# EAGLE board proyecto (EAGLE 9.0.1)

Size 56.82 x 53.33 mm. Coordinates in mm from the lower left corner, seen from the top.
Outline: 0,0 56.82,0 56.82,53.33 0,53.33 0,0
Copper layers (1*16): Top 0.035mm / dielectric 1.5mm / Bottom 0.035mm
Design rules "default": minimum track width 10mil, minimum drill 24mil, track to track 8mil, track to pad 8mil, pad to pad 8mil, via to via 8mil, smd to smd 8mil, copper to edge 40mil, drill to drill 8mil, minimum pad ring 10mil, minimum via ring 8mil, stop-mask expansion 4mil, vias tented up to drill 0mil, thermal gap 10mil

## Footprints (pad centres in the part's own frame; a part is rotated, then mirrored left to right if it is on the bottom)
DC-POWER = drill 0.889 pad 2.54 octagon: + 0,2.54; - 0,-2.54
RADIAL-D11.36MM = drill 1.27 pad 1.905 square: + -2.54,0 | drill 1.27 pad 1.905: - 2.54,0
D-7.5 = drill 0.813 long: A 3.81,0; C -3.81,0
M3XXH = drill 1.016 long: 1 -3.81,3.81; 2 -3.81,-3.81; O -6.35,-3.81; P 6.35,-3.81; P@ 6.35,3.81; S -6.35,3.81
2P-2.54-65/35MIL = drill 0.889 pad 1.651 square: 1 0,1.27 | drill 0.889 pad 1.651: 2 0,-1.27
1X3P-2.54-2.54-11.6-3.0-BLACK-MALE = drill 0.889 pad 1.651 square: 1 0,2.54 | drill 0.889 pad 1.651: 2 0,0; 3 0,-2.54
0207/10 = drill 0.813 octagon: 1 -5.08,0; 2 5.08,0
B25V = drill 0.813 long: A 2.54,0.635; E -2.54,0.635; S 0,0.635
TO92 = drill 0.813 octagon: 1 1.27,0; 2 0,1.905; 3 -1.27,0
DIL14 = drill 0.813 long: 1 -7.62,-3.81; 2 -5.08,-3.81; 3 -2.54,-3.81; 4 0,-3.81; 5 2.54,-3.81; 6 5.08,-3.81; 7 7.62,-3.81; 8 7.62,3.81; 9 5.08,3.81; 10 2.54,3.81; 11 0,3.81; 12 -2.54,3.81; 13 -5.08,3.81; 14 -7.62,3.81
DIL08 = drill 0.813 pad 1.27: 1 -3.81,-3.81; 2 -1.27,-3.81; 3 1.27,-3.81; 4 3.81,-3.81; 5 3.81,3.81; 6 1.27,3.81; 7 -1.27,3.81; 8 -3.81,3.81

## Placement (x,y rotation side)
BAT9V  [DC-POWER]  26.59,45.64 0 top
C2  1uF  [RADIAL-D11.36MM]  27.86,17.7 0 top
D1  [D-7.5]  16.43,31.67 0 top
K1  [M3XXH]  40.56,45.64 0 top
L1  [2P-2.54-65/35MIL]  41.83,26.59 0 top
PIR1  [1X3P-2.54-2.54-11.6-3.0-BLACK-MALE]  5,10.08 0 top
R2  1k‎Ω  [0207/10]  5,35.48 0 top
R3  1k‎Ω  [0207/10]  17.7,10.08 0 top
RPOT1  250k‎Ω  [B25V]  17.7,48.18 0 top
T1  [TO92]  18.97,2.46 0 top
U1  [DIL14]  8.81,22.78 0 top
U2  [DIL08]  5,48.18 0 top

## Library data of the parts
BAT9V C2 D1 K1 L1 PIR1 R2 R3 RPOT1 T1 U1 U2 = AUTODESK_CIRCUITS_BREADBOARD

## Nets
N$1: U1.13
N$2: U1.8
N$3: U1.12
N$4: U1.2 U2.2
N$5: U1.5
N$6: U1.3
N$7: U1.6
N$8: U1.9
N$9: U1.4
N$10: U1.11
N$11: PIR1.3 U1.1
N$12: R2.2 RPOT1.A RPOT1.S
N$13: C2.+ U2.5
N$14: D1.C K1.1 PIR1.2 R2.1 U1.10 U1.14 U2.4 U2.8
N$15: R3.1 U2.3
N$16: RPOT1.E U2.6 U2.7
N$17: R3.2 T1.2
N$18: C2.- PIR1.1 T1.1 U1.7 U2.1
N$19: K1.P
N$20: K1.O
N$21: BAT9V.- K1.S
N$22: BAT9V.+ L1.1
N$23: D1.A K1.2 T1.3
N$24: K1.P@ L1.2

## Tracks (layer width: path | path; a pad name or v marks a point on that pad's centre or on a via)
N$4  (1 unrouted)
N$11  (1 unrouted)
N$12  (2 unrouted)
N$13  (1 unrouted)
N$14  (7 unrouted)
N$15  (1 unrouted)
N$16  (2 unrouted)
N$17  (1 unrouted)
N$18  (4 unrouted)
N$21  (1 unrouted)
N$22  (1 unrouted)
N$23  (2 unrouted)
N$24  (1 unrouted)